# Altium PCB camm-brd(1).PcbDoc
Units mm, origin at the board's own origin, x right, y up, seen from the top; angles counter-clockwise.
Board outline 90.17 x 95.88 mm, 2 copper layers (F.Cu, B.Cu); 12 components, 8 nets, 24 pads, 0 vias.
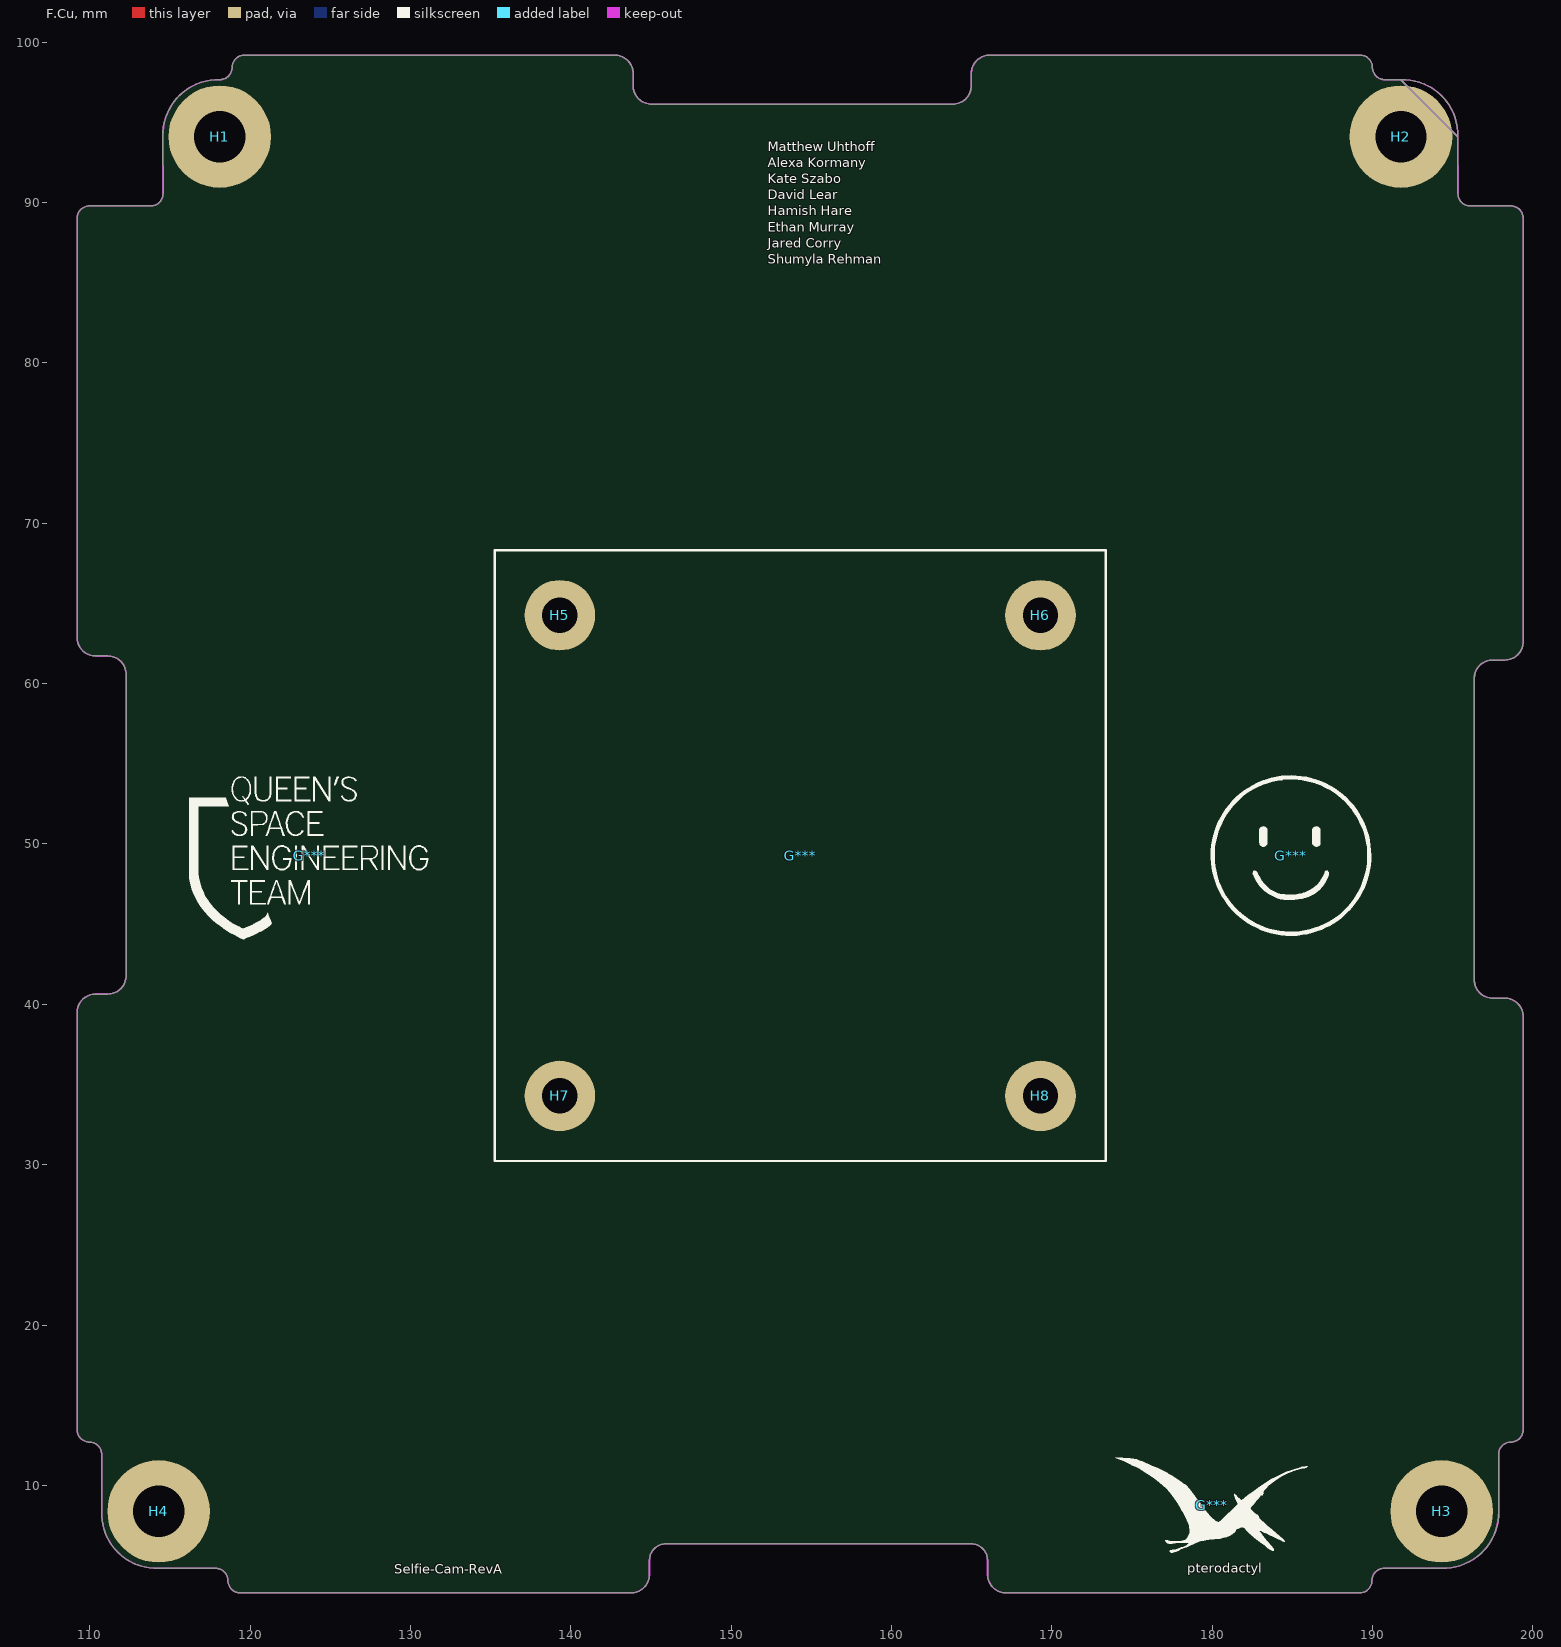
[diagram p0: F.Cu view]
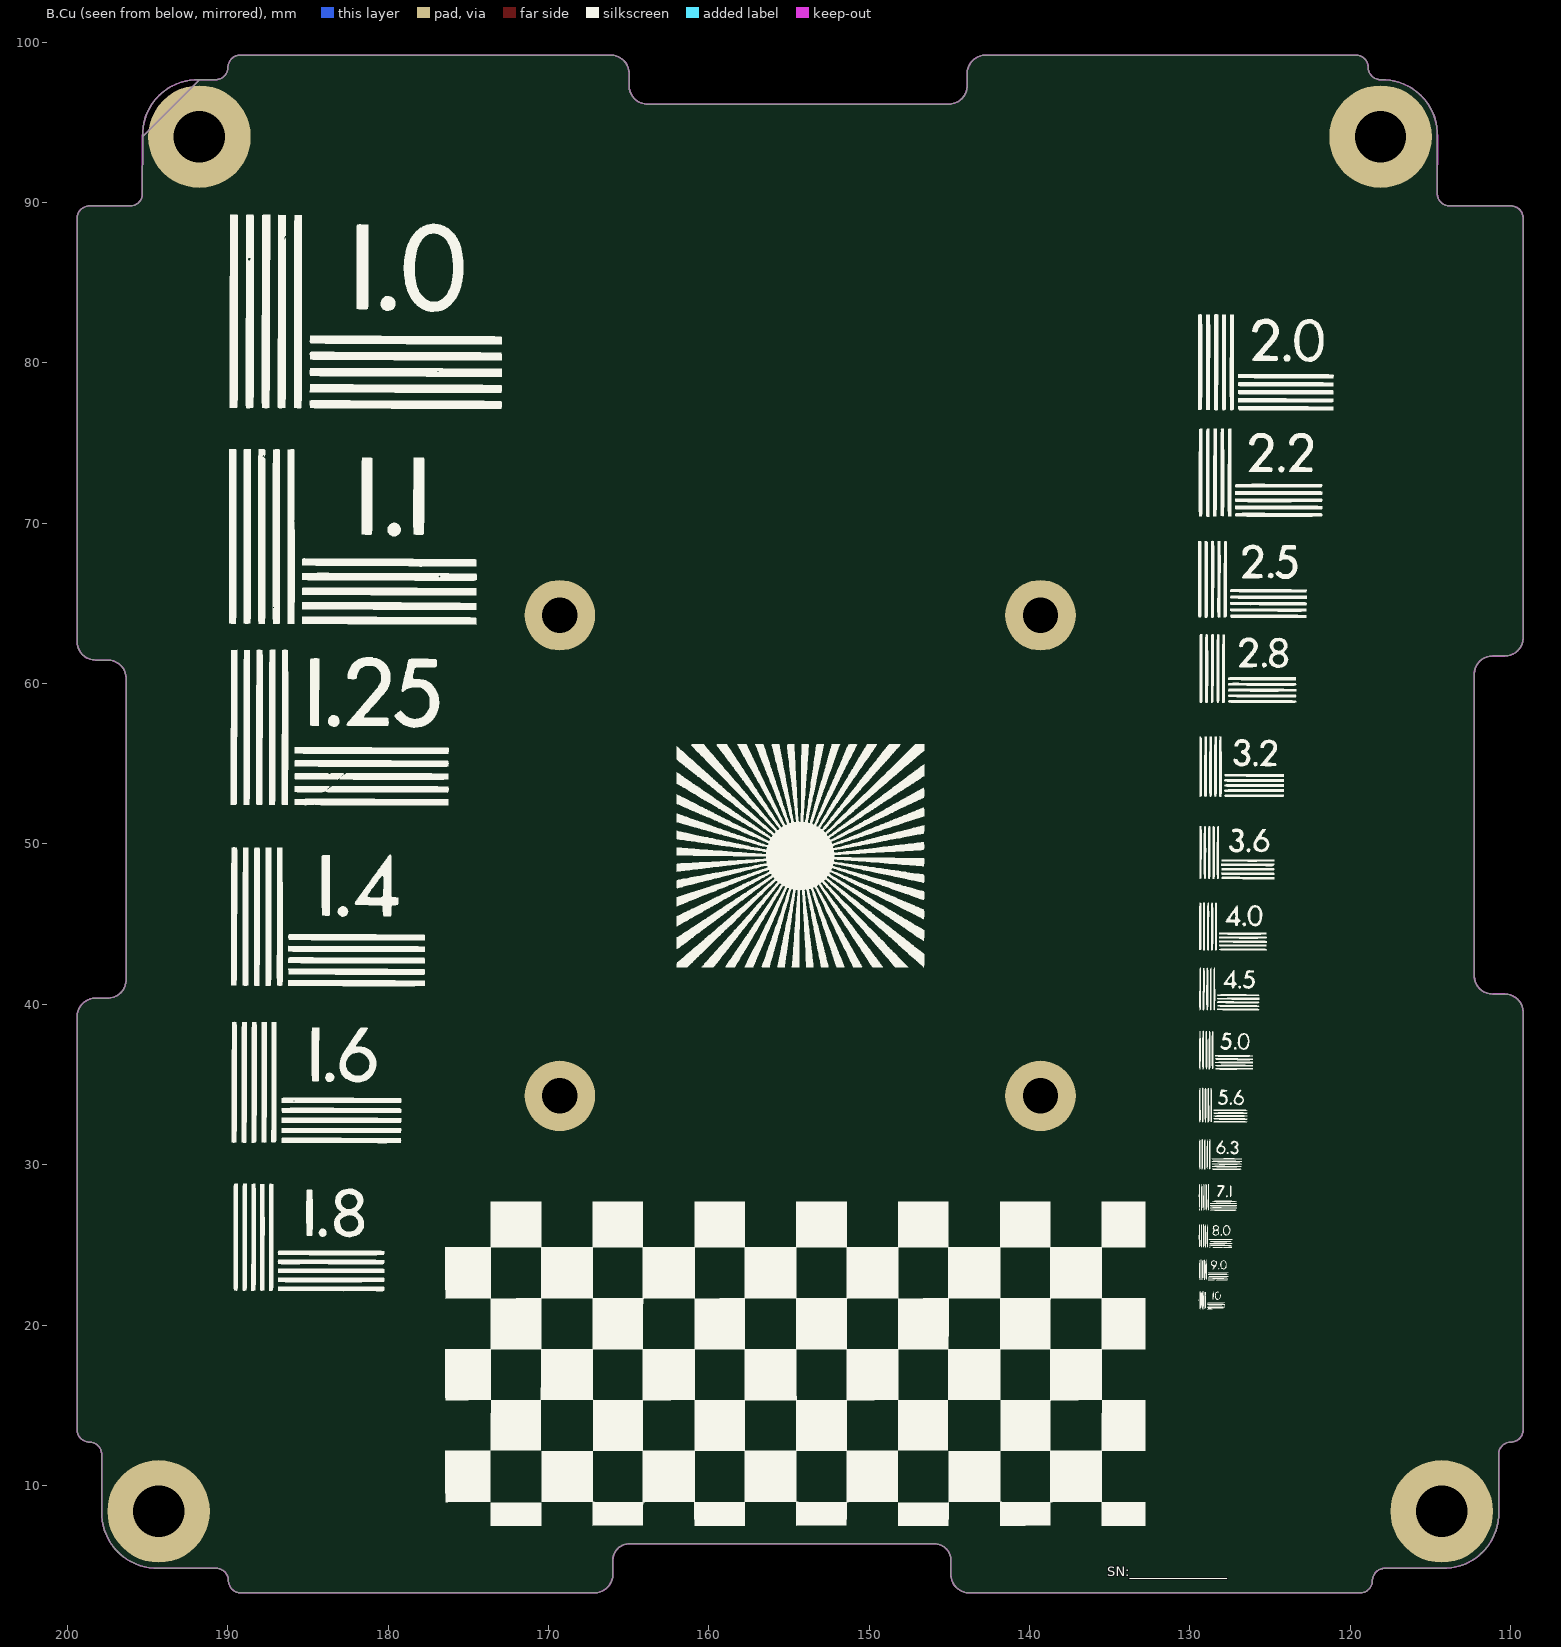
[diagram p1: B.Cu view, seen from below]

## Layer stack, top to bottom
F.Mask: solder mask 0.0102, Solder Resist, Dk 3.5
F.Cu: signal copper 0.0356
Dielectric 1: dielectric 0.32, FR-4, Dk 4.8
B.Cu: signal copper 0.0356
B.Mask: solder mask 0.0102, Solder Resist, Dk 3.5

## Board outline
195.317,94.098 ccw(c191.866,94.212) 191.761,97.663 190.754,97.663 cw(c190.754,98.425) 189.992,98.425 ccw(c189.23,98.425) 166.878,99.187 166.116,99.187 ccw(c166.116,98.044) 164.973,98.044 164.973,97.282 cw(c163.83,97.282) 163.83,96.139 145.034,96.139 cw(c145.034,97.282) 143.891,97.282 143.891,98.044 ccw(c142.748,98.044) 142.748,99.187 119.643,99.187 ccw(c119.643,98.425) 118.881,98.425 cw(c118.119,98.425) 118.119,97.663 ccw(c118.014,94.212) 114.563,94.098 114.572,90.551 cw(c113.81,90.551) 113.81,89.789 109.982,89.789 ccw(c109.982,89.027) 109.22,62.865 ccw(c110.363,62.865) 110.363,61.722 111.125,61.722 cw(c111.125,60.579) 112.268,41.783 cw(c111.125,41.783) 111.125,40.64 110.363,40.64 ccw(c110.363,39.497) 109.22,39.497 109.22,13.462 ccw(c109.982,13.462) 109.982,12.7 cw(c109.982,11.938) 110.744,8.382 ccw(c114.186,8.268) 114.808,4.826 115.951,4.826 117.856,4.826 cw(c117.856,4.064) 118.618,4.064 ccw(c119.38,4.064) 143.764,3.302 ccw(c143.764,4.445) 144.907,4.445 144.907,5.334 cw(c145.923,5.334) 145.923,6.35 164.973,6.35 cw(c164.973,5.334) 165.989,5.334 165.989,4.445 ccw(c167.132,4.445) 189.199,3.302 ccw(c189.199,4.064) 189.961,4.064 cw(c190.724,4.064) 194.301,4.835 ccw(c194.415,8.277) 197.857,8.391 197.866,11.938 cw(c198.628,11.938) 198.628,12.7 ccw(c198.628,13.462) 199.39,13.462 199.39,39.243 ccw(c198.247,39.243) 198.247,40.386 197.485,40.386 cw(c197.485,41.529) 196.342,41.529 196.342,60.325 cw(c197.485,60.325) 197.485,61.468 198.247,61.468 ccw(c198.247,62.611) 199.39,62.611 199.39,89.027 ccw(c198.628,89.027) 198.628,89.789 196.088,89.789 cw(c196.088,90.551) 195.326,90.551 195.317,94.098 ccw(c191.866,94.212) 195.317,94.098

## Design rules (kind name [scope] priority, off if disabled: settings)
Clearance [All] p1: gap=0.254 ignorepadtopadclearanceinfootprint=FALSE except(0: Arc-Hole Track-Hole SMDPad-Hole THPad-Hole Via-Hole Fill-Hole Poly-Hole Region-Hole Text-Hole)
MinimumSolderMaskSliver [All] p1: minsoldermaskwidth=0
PolygonConnect [All] p1: connectstyle=Direct reliefconductorwidth=0.254 reliefentries=4 polygonreliefangle="90 Angle" airgapwidth=0.254
RoutingVias [All] p1: holewidth=0.711 width=1.27 viastyle="Through Hole" minholewidth=0.711 minwidth=1.27 maxholewidth=0.711 maxwidth=1.27
SilkToSilkClearance [All] p1: silktosilkclearance=0
SilkToSolderMaskClearance [IsPad] p1: minsilkscreentomaskgap=0 clearancetoexposedcopper=TRUE
SolderMaskExpansion [All] p1: expansion=0.102 istentingtop=FALSE
Width [All] p1: maxlimit=0.254 minlimit=0.254 preferedwidth=0.254
27 further rules are at their usual default settings.

## Components (designator, comment, footprint, x,y, rotation, side; value= is the part's Value field where it differs from the comment)
G*** "LOGO" LOGO 154.305,49.276 r0 top
G*** "LOGO" LOGO 179.959,8.763 r0 top
G*** "LOGO" LOGO 184.912,49.276 r0 top
G*** "LOGO" LOGO 123.698,49.276 r0 top
H1 "MountingHole_Pad" MountingHole_3.2mm_M3_Pad_TopBottom 118.11,94.107 r0 top
H2 "MountingHole_Pad" MountingHole_3.2mm_M3_Pad_TopBottom 191.77,94.107 r0 top
H3 "MountingHole_Pad" MountingHole_3.2mm_M3_Pad_TopBottom 194.31,8.382 r0 top
H4 "MountingHole_Pad" MountingHole_3.2mm_M3_Pad_TopBottom 114.3,8.382 r0 top
H5 "MountingHole_Pad" MountingHole_2.2mm_M2_Pad_TopBottom 139.319,64.262 r0 top
H6 "MountingHole_Pad" MountingHole_2.2mm_M2_Pad_TopBottom 169.291,64.262 r0 top
H7 "MountingHole_Pad" MountingHole_2.2mm_M2_Pad_TopBottom 139.319,34.29 r0 top
H8 "MountingHole_Pad" MountingHole_2.2mm_M2_Pad_TopBottom 169.291,34.29 r0 top

## Footprints (in the part's own frame and the unit in brackets; to place one, negate y for a bottom-side part, rotate by r counter-clockwise, add the part's x,y. Pads: shape width x height; smd on the part's side, far side on the other; paste and mask are expansions set on the pad)
LOGO [mm]
MountingHole_2.2mm_M2_Pad_TopBottom [mm]
  round 4.4 smd far side paste-4.4 mask+0: 1(0,0)
  round 4.4 smd paste-4.4 mask+0: 1(0,0)
  round 2.6 hole 2.2 paste-2539.97 mask+0: 1(0,0)
MountingHole_3.2mm_M3_Pad_TopBottom [mm]
  round 6.4 smd far side paste-6.4 mask+0: 1(0,0)
  round 6.4 smd paste-6.4 mask+0: 1(0,0)
  round 3.6 hole 3.2 paste-2539.97 mask+0: 1(0,0)

## Part data
H1 H2 H3 H4: library part MountingHole_3.2mm_M3_Pad_TopBottom, "Mounting Hole 3.2mm, M3", Sheetfile=camm-brd.kicad_sch
H5 H6 H7 H8: library part MountingHole_2.2mm_M2_Pad_TopBottom, "Mounting Hole 2.2mm, M2", Sheetfile=camm-brd.kicad_sch

## Nets (pads, with @x,y where several pads share a name; then routed paths per layer and width w, separated by ;. In a path a pad name is that pad's centre, name@x,y a point inside that pad or via, vN(x,y) a via of type N, cw(c..) or ccw(c..) an arc to the next point about the centre after c; other vN are vias at no path point)
unconnected-(H1-Pad1): H1.1
unconnected-(H2-Pad1): H2.1
unconnected-(H3-Pad1): H3.1
unconnected-(H4-Pad1): H4.1
unconnected-(H5-Pad1): H5.1
unconnected-(H6-Pad1): H6.1
unconnected-(H7-Pad1): H7.1
unconnected-(H8-Pad1): H8.1

## Keep-outs
Edge.Cuts:
  lines w0.1: 109.22,13.462 ccw(c109.982,13.462) 109.982,12.7 ; 109.22,13.462 ccw(c109.982,13.462) 109.982,12.7 ; 109.22,13.462 109.22,39.497 ; 109.22,13.462 109.22,39.497 ; 109.22,39.497 cw(c110.363,39.497) 110.363,40.64 ; 109.22,39.497 cw(c110.363,39.497) 110.363,40.64 ; 109.22,62.865 ccw(c110.363,62.865) 110.363,61.722 ; 109.22,62.865 ccw(c110.363,62.865) 110.363,61.722 ; 109.22,62.865 109.22,89.027 ; 109.22,62.865 109.22,89.027 ; 109.22,89.027 cw(c109.982,89.027) 109.982,89.789 ; 109.22,89.027 cw(c109.982,89.027) 109.982,89.789 ; 109.982,12.7 cw(c109.982,11.938) 110.744,11.938 ; 109.982,12.7 cw(c109.982,11.938) 110.744,11.938 ; 109.982,89.789 113.81,89.789 ; 109.982,89.789 113.81,89.789 ; 110.363,40.64 111.125,40.64 ; 110.363,40.64 111.125,40.64 ; 110.363,61.722 111.125,61.722 ; 110.363,61.722 111.125,61.722 ; 110.744,8.382 ccw(c114.186,8.268) 114.3,4.826 ; 110.744,8.382 ccw(c114.186,8.268) 114.3,4.826 ; 110.744,8.382 110.744,11.938 ; 110.744,8.382 110.744,11.938 ; 111.125,40.64 ccw(c111.125,41.783) 112.268,41.783 ; 111.125,40.64 ccw(c111.125,41.783) 112.268,41.783 ; 111.125,61.722 cw(c111.125,60.579) 112.268,60.579 ; 111.125,61.722 cw(c111.125,60.579) 112.268,60.579 ; 112.268,41.783 112.268,60.579 ; 112.268,41.783 112.268,60.579 ; 113.81,89.789 ccw(c113.81,90.551) 114.572,90.551 ; 113.81,89.789 ccw(c113.81,90.551) 114.572,90.551 ; 114.3,4.826 114.808,4.826 ; 114.3,4.826 114.808,4.826 ; 114.563,94.098 cw(c118.014,94.212) 118.119,97.663 ; 114.563,94.098 cw(c118.014,94.212) 118.119,97.663 ; 114.563,94.098 114.572,90.551 ; 114.563,94.098 114.572,90.551 ; 114.808,4.826 115.951,4.826 ; 114.808,4.826 115.951,4.826 ; 115.951,4.826 117.856,4.826 ; 115.951,4.826 117.856,4.826 ; 117.856,4.826 cw(c117.856,4.064) 118.618,4.064 ; 117.856,4.826 cw(c117.856,4.064) 118.618,4.064 ; 118.119,97.663 ccw(c118.119,98.425) 118.881,98.425 ; 118.119,97.663 ccw(c118.119,98.425) 118.881,98.425 ; 118.618,4.064 ccw(c119.38,4.064) 119.38,3.302 ; 118.618,4.064 ccw(c119.38,4.064) 119.38,3.302 ; 118.881,98.425 cw(c119.643,98.425) 119.643,99.187 ; 118.881,98.425 cw(c119.643,98.425) 119.643,99.187 ; 119.38,3.302 143.764,3.302 ; 119.38,3.302 143.764,3.302 ; 119.643,99.187 142.748,99.187 ; 119.643,99.187 142.748,99.187 ; 142.748,99.187 cw(c142.748,98.044) 143.891,98.044 ; 142.748,99.187 cw(c142.748,98.044) 143.891,98.044 ; 143.764,3.302 ccw(c143.764,4.445) 144.907,4.445 ; 143.764,3.302 ccw(c143.764,4.445) 144.907,4.445 ; 143.891,97.282 ccw(c145.034,97.282) 145.034,96.139 ; 143.891,97.282 ccw(c145.034,97.282) 145.034,96.139 ; 143.891,97.282 143.891,98.044 ; 143.891,97.282 143.891,98.044 ; 144.907,4.445 144.907,5.334 ; 144.907,4.445 144.907,5.334 ; 144.907,5.334 cw(c145.923,5.334) 145.923,6.35 ; 144.907,5.334 cw(c145.923,5.334) 145.923,6.35 ; 145.034,96.139 163.83,96.139 ; 145.034,96.139 163.83,96.139 ; 145.923,6.35 164.973,6.35 ; 145.923,6.35 164.973,6.35 ; 163.83,96.139 ccw(c163.83,97.282) 164.973,97.282 ; 163.83,96.139 ccw(c163.83,97.282) 164.973,97.282 ; 164.973,6.35 cw(c164.973,5.334) 165.989,5.334 ; 164.973,6.35 cw(c164.973,5.334) 165.989,5.334 ; 164.973,97.282 164.973,98.044 ; 164.973,97.282 164.973,98.044 ; 164.973,98.044 cw(c166.116,98.044) 166.116,99.187 ; 164.973,98.044 cw(c166.116,98.044) 166.116,99.187 ; 165.989,4.445 ccw(c167.132,4.445) 167.132,3.302 ; 165.989,4.445 ccw(c167.132,4.445) 167.132,3.302 ; 165.989,4.445 165.989,5.334 ; 165.989,4.445 165.989,5.334 ; 166.116,99.187 166.878,99.187 ; 166.116,99.187 166.878,99.187 ; 166.878,99.187 189.23,99.187 ; 166.878,99.187 189.23,99.187 ; 167.132,3.302 189.199,3.302 ; 167.132,3.302 189.199,3.302 ; 189.199,3.302 ccw(c189.199,4.064) 189.961,4.064 ; 189.199,3.302 ccw(c189.199,4.064) 189.961,4.064 ; 189.23,99.187 cw(c189.23,98.425) 189.992,98.425 ; 189.23,99.187 cw(c189.23,98.425) 189.992,98.425 ; 189.961,4.064 cw(c190.724,4.064) 190.754,4.826 ; 189.961,4.064 cw(c190.724,4.064) 190.754,4.826 ; 189.992,98.425 ccw(c190.754,98.425) 190.754,97.663 ; 189.992,98.425 ccw(c190.754,98.425) 190.754,97.663 ; 190.754,4.826 194.301,4.835 ; 190.754,4.826 194.301,4.835 ; 190.754,97.663 191.761,97.663 ; 190.754,97.663 191.761,97.663 ; 191.761,97.663 cw(c191.866,94.212) 195.317,94.098 ; 191.761,97.663 cw(c191.866,94.212) 195.317,94.098 ; 191.761,97.663 cw(c191.866,94.212) 195.317,94.098 ; 191.761,97.663 cw(c191.866,94.212) 195.317,94.098 ; 191.761,97.663 195.317,94.098 ; 194.301,4.835 ccw(c194.415,8.277) 197.857,8.391 ; 194.301,4.835 ccw(c194.415,8.277) 197.857,8.391 ; 195.317,94.098 195.326,90.551 ; 195.317,94.098 195.326,90.551 ; 195.326,90.551 ccw(c196.088,90.551) 196.088,89.789 ; 195.326,90.551 ccw(c196.088,90.551) 196.088,89.789 ; 196.088,89.789 198.628,89.789 ; 196.088,89.789 198.628,89.789 ; 196.342,41.529 ccw(c197.485,41.529) 197.485,40.386 ; 196.342,41.529 ccw(c197.485,41.529) 197.485,40.386 ; 196.342,41.529 196.342,60.325 ; 196.342,41.529 196.342,60.325 ; 196.342,60.325 cw(c197.485,60.325) 197.485,61.468 ; 196.342,60.325 cw(c197.485,60.325) 197.485,61.468 ; 197.485,40.386 198.247,40.386 ; 197.485,40.386 198.247,40.386 ; 197.485,61.468 198.247,61.468 ; 197.485,61.468 198.247,61.468 ; 197.857,8.391 197.866,11.938 ; 197.857,8.391 197.866,11.938 ; 197.866,11.938 cw(c198.628,11.938) 198.628,12.7 ; 197.866,11.938 cw(c198.628,11.938) 198.628,12.7 ; 198.247,40.386 cw(c198.247,39.243) 199.39,39.243 ; 198.247,40.386 cw(c198.247,39.243) 199.39,39.243 ; 198.247,61.468 ccw(c198.247,62.611) 199.39,62.611 ; 198.247,61.468 ccw(c198.247,62.611) 199.39,62.611 ; 198.628,12.7 ccw(c198.628,13.462) 199.39,13.462 ; 198.628,12.7 ccw(c198.628,13.462) 199.39,13.462 ; 198.628,89.789 cw(c198.628,89.027) 199.39,89.027 ; 198.628,89.789 cw(c198.628,89.027) 199.39,89.027 ; 199.39,13.462 199.39,39.243 ; 199.39,13.462 199.39,39.243 ; 199.39,62.611 199.39,89.027 ; 199.39,62.611 199.39,89.027

## Silkscreen, mask and mechanical layers (free items; w line width, h text height)
F.SilkS:
  lines w0.15: 135.255,30.226 135.255,68.326 154.305,68.326 173.355,68.326 173.355,30.226 135.255,30.226
  text "Matthew Uhthoff / Alexa Kormany / Kate Szabo / David Lear / Hamish Hare / Ethan Murray / Jared Corry / Shumyla Rehman" at 152.295,85.975 h1
  text "pterodactyl" at 178.43,4.321 h1
  text "Selfie-Cam-RevA" at 128.978,4.286 h1
B.SilkS:
  text "SN:_______________" at 135.166,4.113 h1
User.1:
  lines w0.1: 109.474,49.276 197.739,49.276 ; 154.305,2.54 154.305,100.203

## Dimensions
139.319,64.262 to 169.291,64.262 on User.2
139.319,34.29 to 169.291,34.29 on User.2
139.319,34.29 to 139.319,64.262 on User.2
154.305,49.276 to 154.305,68.326 on User.2
154.305,49.276 to 135.255,49.276 on User.2
154.305,49.276 to 154.305,30.226 on User.2
169.291,64.262 to 169.291,34.29 on User.2
154.305,49.276 to 173.355,49.276 on User.2
142.748,98.679 to 166.116,98.679 on User.1
114.808,8.382 to 114.808,3.302 on User.1
114.3,8.89 to 109.22,8.89 on User.1
143.764,4.318 to 167.132,4.318 on User.1
118.618,99.187 to 118.618,94.107 on User.1
109.22,99.187 to 199.39,99.187 on User.1
193.802,3.302 to 193.802,8.382 on User.1
198.882,62.611 to 198.882,39.243 on User.1
199.39,8.89 to 194.31,8.89 on User.1
109.22,93.599 to 118.11,93.599 on User.1
109.22,99.187 to 109.22,3.302 on User.1
110.49,62.865 to 110.49,39.497 on User.1
109.22,99.187 to 191.77,99.187 on User.1